# Altium PCB Board.PcbDoc (part 1 of 2)
Units mil, origin at the board's own origin, x right, y up, seen from the top; angles counter-clockwise.
Board outline 6771.85 x 2362.21 mil, 2 copper layers (Top Layer, Bottom Layer), stack 61.8 mil thick; 72 components, 58 nets, 281 pads, 84 vias.
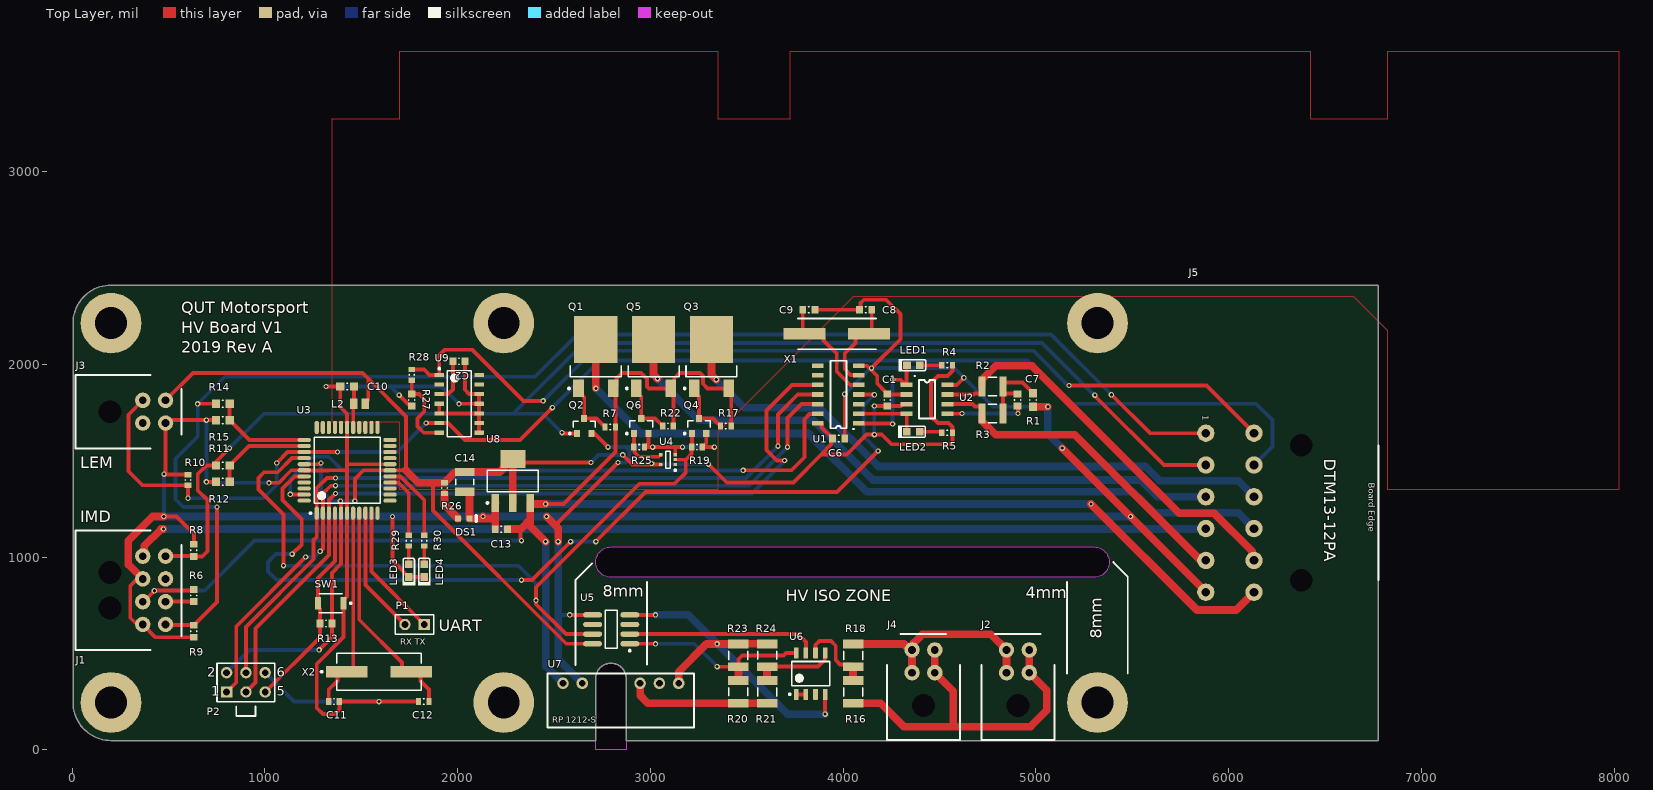
[diagram p0: Top Layer view]
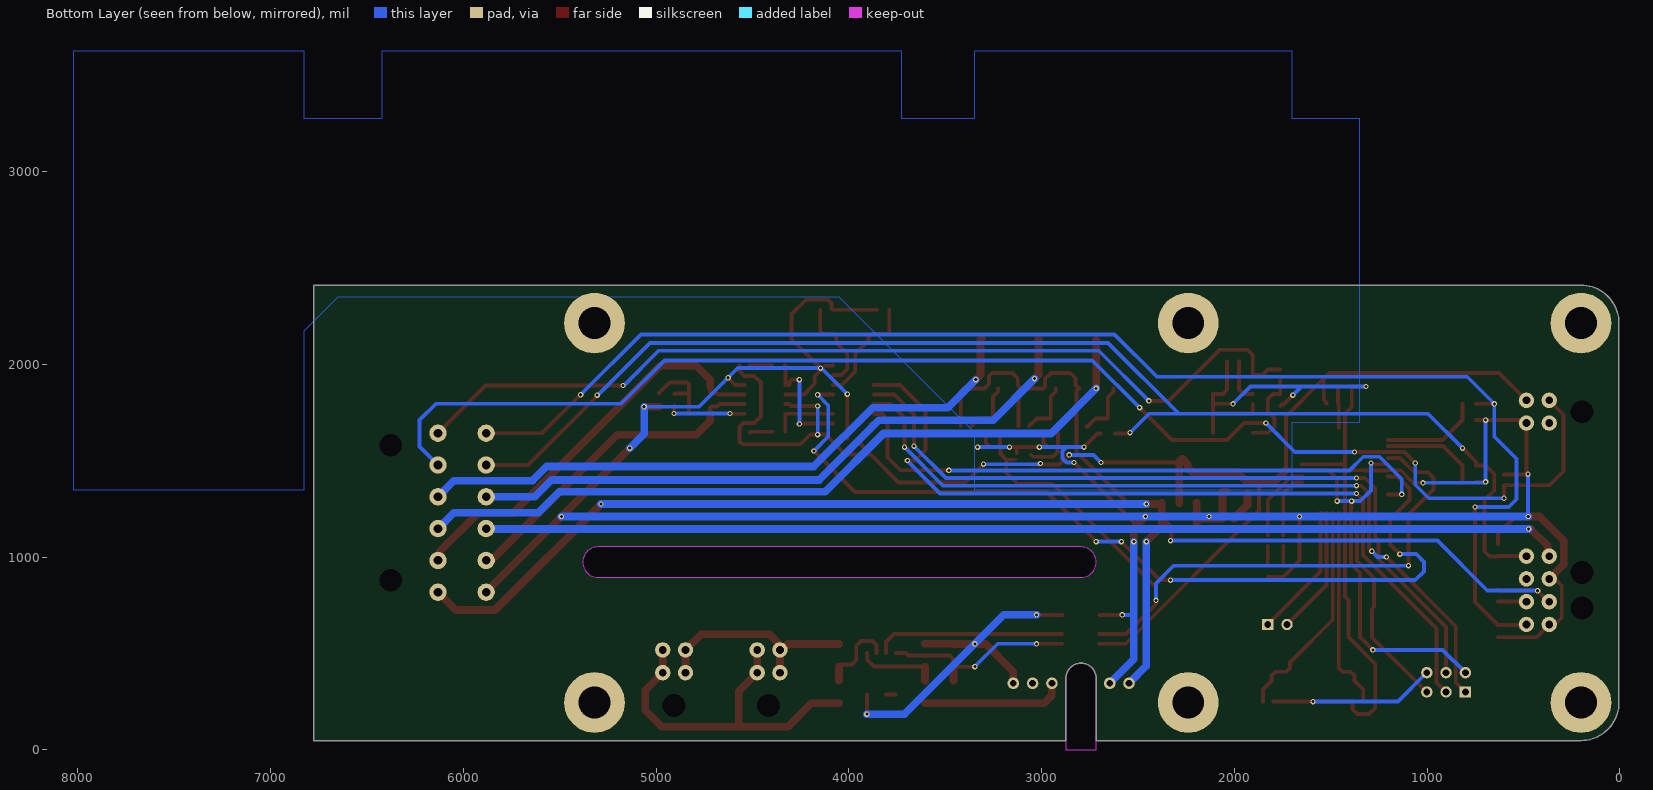
[diagram p1: Bottom Layer view, seen from below]

## Layer stack, top to bottom
Top Solder: solder mask 0.4, Solder Resist, Dk 3.5
Top Layer: signal copper 1.4
Dielectric 1: core 59, Core-043, Dk 4.3
Bottom Layer: signal copper 1.4
Bottom Solder: solder mask 0.4, Solder Resist, Dk 3.5

## Board outline
201.85,48.15 cw(c201.85,245) 5,245 5,2213.5 cw(c201.85,2213.5) 201.85,2410.35 6776.85,2410.35 6776.85,48.15 2874.33,48.15 2874.33,370 ccw(c2795.59,370) 2716.85,370 2716.85,48.15
cut-out: 2795.59,895 cw(c2795.59,973.74) 2795.59,1052.48 5301.85,1052.48 cw(c5301.85,973.74) 5301.85,895
cut-out: 2716.85,0 2716.85,370 cw(c2795.59,370) 2874.33,370 2874.33,0

## Design rules (kind name [scope] priority, off if disabled: settings)
Clearance [All] p1: gap=8 ignorepadtopadclearanceinfootprint=FALSE except(0: Arc-Hole Track-Hole SMDPad-Hole THPad-Hole Via-Hole Fill-Hole Poly-Hole Region-Hole Text-Hole; 6: SMDPad-SMDPad)
PolygonConnect [All] p1: connectstyle=Relief reliefconductorwidth=10 reliefentries=4 polygonreliefangle="90 Angle" airgapwidth=10
RoutingVias [All] p1: holewidth=15.75 width=27.56 viastyle="Through Hole" minholewidth=15.75 minwidth=27.56 maxholewidth=15.75 maxwidth=27.56
SolderMaskExpansion [All] p1: expansion=4
Width [All] p1: maxlimit=40 minlimit=10 preferedwidth=20 minimp=50.000000 maximp=50.000000 favimp=50.000000
30 further rules are at their usual default settings.

## Classes and differential pairs
component class Power: C13 C14 DS1 R26 U8
component class TSAL: Q3 Q4 Q5 Q6 R16 R17 R18 R19 R20 R21 R22 R23 R24 R25 U4 U5 U6 U7
component class Offboard: J4 J5
component class MCU: C10 C11 C12 L2 LED3 LED4 P1 P2 R11 R12 R13 R14 R15 R29 R30 SW1 U3 X2
component class LEM: C2 J3 R10 R27 R28 U9
component class IMD: J1 J2 Q1 Q2 R6 R7 R8 R9
component class CAN: C1 C6 C7 C8 C9 LED1 LED2 R1 R2 R3 R4 R5 U1 U2 X1

## Components (designator, comment, footprint, x,y, rotation, side; value= is the part's Value field where it differs from the comment)
C1 "CAP 100nF 16V 0603(1608)" CAPC0603(1608)100_N 4229.92,1815 r270 top value=100nF
C2 "CAP 100nF 16V 0603(1608)" CAPC0603(1608)100_N 2006.85,2015 r180 top value=100nF
C6 "CAP 100nF 16V 0603(1608)" CAPC0603(1608)100_N 3976.85,1615 r180 top value=100nF
C7 "CAP 4.7nF 50V 0603(1608)" CAPC0603(1608)100_M 4984.92,1815 r90 top value=4.7nF
C8 "CAP 22pF 16V 0603(1608)" CAPC0603(1608)100_N 4116.85,2283.11 r0 top value=22pF
C9 "CAP 22pF 16V 0603(1608)" CAPC0603(1608)100_N 3821.85,2283.11 r0 top value=22pF
C10 "CAP 100nF 16V 0603(1608)" CAPC0603(1608)100_M 1426.85,1885 r0 top value=100nF
C11 "CAP 22pF 16V 0603(1608)" CAPC0603(1608)100_L 1359.29,250 r180 top value=22pF
C12 "CAP 22pF 16V 0603(1608)" CAPC0603(1608)100_L 1824.29,250 r0 top value=22pF
C13 "CAP 100nF 25V 0603(1608)" CAPC0603(1608)100_N 2226.85,1145 r0 top value=100nF
C14 "12103D106KAT2A" CAPC3225X279X50LL20T25 2036.85,1390 r90 top
DS1 "LTST-C191KGKT" LITE-ON-LTST-C191KRKT-2_V 2031.85,1200 r0 top
J1 "Microfit 3.0 2x4" Microfit_2X4_R_TH 196.85,827.52 r270 top
J2 "Microfit 3.0 2x2" MICROFIT_2X2_R_TH 4906.85,230 r0 top
J3 "Microfit 3.0 2x2" MICROFIT_2X2_R_TH 196.85,1754.06 r270 top
J4 "Microfit 3.0 2x2" MICROFIT_2X2_R_TH 4416.85,230 r0 top
J5 "DTM12" DTM13-12PA 6376.85,1230 r270 top
L2 "LQM21FN100M70L" MURA-IND0805_L 1491.85,1795 r0 top
LED1 "2V 20mA 0603 Org" KING-LED0603-25-ORANGE_V 4364.92,1995 r0 top
LED2 "2V 20mA 0603 Org" KING-LED0603-25-ORANGE_V 4363.39,1650 r0 top
LED3 "2V 20mA 0603 Org" KING-LED0603-25-ORANGE_V 1746.85,929.99 r90 top
LED4 "2V 20mA 0603 Org" KING-LED0603-25-ORANGE_V 1826.85,929.99 r90 top
P1 "UART Header" HDR1X2 1826.85,650 r180 top
P2 "Header 3X2" HDR2X3 801.85,300 r0 top
Q1 "SUD50P06-15-GE3" VSIL-TO-252AA-3_V 2716.85,2040 r90 top
Q2 "2N7002KT1G" ONSC-SOT-23-3-318-08_V 2656.85,1680 r90 top
Q3 "SUD50P06-15-GE3" VSIL-TO-252AA-3_V 3316.85,2040 r90 top
Q4 "BSS138-7-F" DIOD-SOT23-3_V 3252.74,1680 r90 top
Q5 "SUD50P06-15-GE3" VSIL-TO-252AA-3_V 3016.85,2040 r90 top
Q6 "BSS138-7-F" DIOD-SOT23-3_V 2952.74,1680 r90 top
R1 "300R 5% 0603(1608)" RESC0603(1608)_N 4904.92,1815 r90 top value="300.00 Ohm"
R2 "60R4 1% 1210(3225)" RESC1210(3225)_L 4774.92,1885 r180 top value="60.40 Ohm"
R3 "60R4 1% 1210(3225)" RESC1210(3225)_L 4774.92,1745 r180 top value="60.40 Ohm"
R4 "330R 5% 0603(1608)" RESC0603(1608)_L 4539.92,1995 r0 top value="330.00 Ohm"
R5 "330R 5% 0603(1608)" RESC0603(1608)_L 4539.92,1645 r0 top value="330.00 Ohm"
R6 "2K2 5% 0603(1608)" RESC0603(1608)_N 631.85,800 r90 top value="2200.00 Ohm"
R7 "1K 5% 0603(1608)" RESC0603(1608)_L 2791.85,1675 r0 top value="1000.00 Ohm"
R8 "2K2 5% 0603(1608)" RESC0603(1608)_N 631.85,1035 r270 top value="2200.00 Ohm"
R9 "2K2 5% 0603(1608)" RESC0603(1608)_N 631.85,615 r90 top value="2200.00 Ohm"
R10 "1K 5% 0603(1608)" RESC0603(1608)_L 601.85,1400 r270 top value="1000.00 Ohm"
R11 "22K 5% 0603(1608)" RESC0603(1608)_M 781.85,1475 r180 top value="22000.00 Ohm"
R12 "15K 5% 0603(1608)" RESC0603(1608)_M 781.85,1390 r0 top value="15000.00 Ohm"
R13 "10K 5% 0603(1608)" RESC0603(1608)_N 1316.85,655.23 r0 top value="10000.00 Ohm"
R14 "22K 5% 0603(1608)" RESC0603(1608)_M 781.85,1795 r180 top value="22000.00 Ohm"
R15 "15K 5% 0603(1608)" RESC0603(1608)_M 781.85,1710 r0 top value="15000.00 Ohm"
R16 "9K1 5% 1210(3225)" RESC1210(3225)_N 4051.85,300 r270 top value="9100.00 Ohm"
R17 "1K 5% 0603(1608)" RESC0603(1608)_L 3391.85,1680 r0 top value="1000.00 Ohm"
R18 "1K 5% 1210(3225)" RESC1210(3225)_N 4051.85,490 r270 top value="1000.00 Ohm"
R19 "1K 5% 0603(1608)" RESC0603(1608)_L 3241.85,1570 r180 top value="1000.00 Ohm"
R20 "4K7 5% 1210(3225)" RESC1210(3225)_N 3456.85,300.94 r270 top value="4700.00 Ohm"
R21 "1K 5% 1210(3225)" RESC1210(3225)_N 3605.32,300.31 r270 top value="1000.00 Ohm"
R22 "1K 5% 0603(1608)" RESC0603(1608)_L 3091.85,1680 r0 top value="1000.00 Ohm"
R23 "3K3 5% 1210(3225)" RESC1210(3225)_N 3456.85,490 r270 top value="3300.00 Ohm"
R24 "1K 5% 1210(3225)" RESC1210(3225)_N 3605.32,490.31 r270 top value="1000.00 Ohm"
R25 "1K 5% 0603(1608)" RESC0603(1608)_L 2941.85,1570 r180 top value="1000.00 Ohm"
R26 "100R 5% 0603(1608)" RESC0603(1608)_L 1931.85,1357.56 r90 top value="100.00 Ohm"
R27 "4K7 5% 0603(1608)" RESC0603(1608)_N 1761.85,1815 r270 top value="4700.00 Ohm"
R28 "6K2 5% 0603(1608)" RESC0603(1608)_L 1761.85,1945 r90 top value="6200.00 Ohm"
R29 "330R 5% 0603(1608)" RESC0603(1608)_L 1746.85,1085 r270 top value="330.00 Ohm"
R30 "330R 5% 0603(1608)" RESC0603(1608)_L 1826.85,1085 r270 top value="330.00 Ohm"
SW1 "B3U-1000P" OMRON-B3U-1000_V 1341.85,760 r180 top
U1 "MCP2517FD" "MCP2517FD SOIC" 4081.85,1693.11 r180 top
U2 "MCP2561" "MCP2561 SOIC" 4329.25,1893.11 r0 top
U3 "ATmega1284P-AU" 44A_N 1426.85,1450 r90 top
U4 "NC7SZ04P5X" FAIR-SC70-5_V 3091.85,1505 r180 top
U5 "Si8620BC-B-IS" SLAB-SOIC-8-NB_M 2796.85,625 r180 top
U6 "LM358AM" D0008A_N 3831.85,395 r90 top
U7 "Isolated DC DC Converter" RP1212S 2846.85,345 r0 top
U8 "LD1117S50CTR" SOT-223_N 2286.85,1395 r90 top
U9 "LM339D" D0014A_L 2008.5,1795 r0 top
X1 "Crystal 20MHz" "Crystal 20MHz" 3966.85,2158.11 r180 top
X2 "ATS16ASM-1" CTS-ATS-SM-XTAL-2 1591.85,405 r0 top

## Footprints (in the part's own frame and the unit in brackets; to place one, negate y for a bottom-side part, rotate by r counter-clockwise, add the part's x,y. Pads: shape width x height; smd on the part's side, far side on the other; paste and mask are expansions set on the pad)
44A_N [mm] "Thin QFP, 44-Leads, Body 10x10mm, Pitch 0.8mm, IPC Medium Density"
  oval 1.75x0.55 smd: 1(-5.65,4) 2(-5.65,3.2) 3(-5.65,2.4) 4(-5.65,1.6) 5(-5.65,0.8) 6(-5.65,0) 7(-5.65,-0.8) 8(-5.65,-1.6) 9(-5.65,-2.4) 10(-5.65,-3.2) 11(-5.65,-4) 23(5.65,-4) 24(5.65,-3.2) 25(5.65,-2.4) 26(5.65,-1.6) 27(5.65,-0.8) 28(5.65,0) 29(5.65,0.8) 30(5.65,1.6) 31(5.65,2.4) 32(5.65,3.2) 33(5.65,4)
  oval 0.55x1.75 smd: 12(-4,-5.65) 13(-3.2,-5.65) 14(-2.4,-5.65) 15(-1.6,-5.65) 16(-0.8,-5.65) 17(0,-5.65) 18(0.8,-5.65) 19(1.6,-5.65) 20(2.4,-5.65) 21(3.2,-5.65) 22(4,-5.65) 34(4,5.65) 35(3.2,5.65) 36(2.4,5.65) 37(1.6,5.65) 38(0.8,5.65) 39(0,5.65) 40(-0.8,5.65) 41(-1.6,5.65) 42(-2.4,5.65) 43(-3.2,5.65) 44(-4,5.65)
  silkscreen extent -5.77,-4.35 4.35,4.95, body extent -5,-5 5,5, height 1.2
CAPC0603(1608)100_L [mm] "Chip Capacitor, Body 1.6x0.8mm, Height 1.0mm, IPC High Density"
  rect 0.7x0.9 smd: 1(-0.7,0) 2(0.7,0)
  silkscreen extent -0.05,-0.35 0.05,0.35, body extent -0.87,-0.47 0.88,0.48, height 1
CAPC0603(1608)100_M [mm] "Chip Capacitor, Body 1.6x0.8mm, Height 1.0mm, IPC Low Density"
  rect 1.1x1.1 smd: 1(-0.9,0) 2(0.9,0)
  silkscreen extent -0.05,-0.45 0.05,0.45, body extent -0.87,-0.47 0.88,0.48, height 1
CAPC0603(1608)100_N [mm] "Chip Capacitor, Body 1.6x0.8mm, Height 1.0mm, IPC Medium Density"
  rect 0.9x1 smd: 1(-0.8,0) 2(0.8,0)
  silkscreen extent -0.05,-0.4 0.05,0.4, body extent -0.87,-0.48 0.88,0.47, height 1
CAPC3225X279X50LL20T25 [mm] "Chip Capacitor, 2-Leads, Body 3.40x2.70mm, IPC High Density"
  rect 1.1x2.6 smd: 1(-1.3,0) 2(1.3,0)
  silkscreen extent -0.35,-1.2 0.35,1.2, body extent -1.7,-1.35 1.7,1.35, height 2.79
"Crystal 20MHz" [mm]
  rect 5.5x1.5 smd: 1(-4.25,0) 2(4.25,0)
  silkscreen extent -5.21,-2.03 5.08,2.03, body extent -5.29,-1.91 5.21,1.9, height 4.3
CTS-ATS-SM-XTAL-2 [mm] "SMD, 2-Leads, Body 11.1x4.83mm, Pitch 8.5mm"
  rect 5.5x1.5 smd: 1(-4.25,0) 2(4.25,0)
  silkscreen extent -7.67,-2.41 5.55,2.41, body extent -5.59,-2.42 5.59,2.42, height 4.3
D0008A_N [mm] "SOIC, 8-Leads, Body 5x4mm, Pitch 1.27mm, IPC Medium Density"
  rrect17% 1.45x0.6 smd: 1(-2.725,1.905) 2(-2.725,0.635) 3(-2.725,-0.635) 4(-2.725,-1.905) 5(2.725,-1.905) 6(2.725,-0.635) 7(2.725,0.635) 8(2.725,1.905)
  silkscreen extent -2.85,-2.5 1.6,2.88, body extent -3,-2.45 3,2.45, height 1.63
D0014A_L [mm] "SOIC, 14-Leads, Body 8.75x4mm, Pitch 1.27mm, IPC High Density"
  rrect18% 1.25x0.55 smd: 1(-2.625,3.81) 2(-2.625,2.54) 3(-2.625,1.27) 4(-2.625,0) 5(-2.625,-1.27) 6(-2.625,-2.54) 7(-2.625,-3.81) 8(2.625,-3.81) 9(2.625,-2.54) 10(2.625,-1.27) 11(2.625,0) 12(2.625,1.27) 13(2.625,2.54) 14(2.625,3.81)
  silkscreen extent -2.75,-4.38 1.6,4.76, body extent -3.02,-4.32 3.02,4.32, height 1.59
DIOD-SOT23-3_V [mm] "SOT23, 3-Leads, Body 3x1.4mm, Pitch 0.95mm"
  rect 0.9x0.8 smd: 1(-1,0.95) 2(-1,-0.95) 3(1,0)
  silkscreen extent -1.12,-1.5 0.7,2.02, body extent -1.25,-1.5 1.25,1.5, height 1.1
DTM13-12PA [mil]
  round 90 hole 45: 1(412.5,-495) 2(247.5,-495) 3(82.5,-495) 4(-82.5,-495) 5(-247.5,-495) 6(-412.5,-495) 7(-412.5,-245) 8(-247.5,-245) 9(-82.5,-245) 10(82.5,-245) 11(247.5,-245) 12(412.5,-245)
  round 0 hole 118.11 mask+39.37: NC(-350,0) NC(350,0)
  silkscreen extent -350,400 350,400, body extent -1200,-590 1200,914, height 1350
FAIR-SC70-5_V [mm] "SOT23, 5-Leads, Body 2.2x1.35mm, Pitch 0.65mm"
  rect 0.5x0.4 smd: 1(-0.95,0.65) 2(-0.95,0) 3(-0.95,-0.65) 4(0.95,-0.65) 5(0.95,0.65)
  silkscreen extent -1.08,-1.1 0.3,1.52, body extent -1.2,-1.1 1.2,1.1, height 1.1
HDR1X2 [mm] "Connector; Header; 2 Position"
  rect 1.5x1.5 hole 0.9: 1(0,0)
  round 1.5 hole 0.9: 2(2.54,0)
  silkscreen extent -1.27,-1.27 3.81,1.27
HDR2X3 [mm] "Connector; Header; 3x2 Position"
  rect 1.5x1.5 hole 0.9: 1(0,0)
  round 1.5 hole 0.9: 2(0,2.54) 3(2.54,0) 4(2.54,2.54) 5(5.08,0) 6(5.08,2.54)
  silkscreen extent -1.27,-1.27 6.35,3.81
KING-LED0603-25-ORANGE_V [mm] "LED, SMT, Body 1.6 x 0.8 mm, 0.25mm Thickness"
  rect 1x1 smd paste+0 mask+0: 1(0.85,0) 2(-0.85,0)
  silkscreen extent -1.97,-0.85 1.6,0.85, body extent -0.8,-0.4 0.8,0.4, height 0.25
LITE-ON-LTST-C191KRKT-2_V [mm] "Chip, 2-Leads, Body 1.6x0.8mm"
  rect 0.8x0.8 smd: 1(-0.75,0) 2(0.75,0)
  silkscreen extent 1.65,-0.4 1.65,0.4, body extent -0.8,-0.4 0.8,0.4, height 0.55
"MCP2517FD SOIC" [mm]
  rect 1.5x0.6 smd: 1(0,0) 2(0,-1.27) 3(0,-2.54) 4(0,-3.81) 5(0,-5.08) 6(0,-6.35) 7(0,-7.62) 8(5.4,-7.62) 9(5.4,-6.35) 10(5.4,-5.08) 11(5.4,-3.81) 12(5.4,-2.54) 13(5.4,-1.27) 14(5.4,0)
  silkscreen extent 0.63,-8.25 3.76,0.76, body extent 0.74,-8.13 4.64,0.52, height 1.74
"MCP2561 SOIC" [mm]
  rect 1.55x0.6 smd: 1(0,0) 2(0,-1.27) 3(0,-2.54) 4(0,-3.81) 5(5.4,-3.81) 6(5.4,-2.54) 7(5.4,-1.27) 8(5.4,0)
  silkscreen extent 1.02,-4.44 3.74,1.14, body extent 0.51,-4.38 4.64,0.52, height 1.65
MICROFIT_2X2_R_TH [mil]
  round 80 hole 40: 1(59.06,170) 2(-59.06,170) 3(59.06,288.19) 4(-59.06,288.19)
  round 0 hole 118.11 mask+10: NC(0,0)
  silkscreen extent -190,-180 190,370, body extent -190,-180 190,210, height 290
Microfit_2X4_R_TH [mil]
  round 80 hole 40: 1(177.17,170) 2(59.06,170) 3(-59.06,170) 4(-177.17,170) 5(177.17,288.19) 6(59.06,288.19) 7(-59.06,288.19) 8(-177.17,288.19)
  round 0 hole 118.11 mask+10: NC(-92.52,0) NC(92.52,0)
  silkscreen extent -310,-180 310,370, body extent -310,-180 310,210, height 290
MURA-IND0805_L [mm] "Chip Inductor, 2-Leads, Body 2.2x1.45mm, IPC High Density"
  rect 0.99x1.39 smd: 1(-0.755,0) 2(0.755,0)
  body extent -1.1,-0.72 1.1,0.72, height 1.45
OMRON-B3U-1000_V [mm] "SMD, 2-Leads, Body 3x2.5mm"
  rect 0.8x1.7 smd: 1(-1.7,0) 2(1.7,0)
  silkscreen extent -2.78,-1.25 1.5,1.25, body extent -1.5,-1.25 1.5,1.25, height 1.75
ONSC-SOT-23-3-318-08_V [mm] "SOT23, 3-Leads, Body 2.92x1.3mm, Pitch 0.95mm"
  rect 0.9x0.8 smd: 1(-1,0.95) 2(-1,-0.95) 3(1,0)
  silkscreen extent -1.12,-1.46 0.65,2.02, body extent -0.65,-1.46 0.65,1.46, height 1.11
RESC0603(1608)_L [mm] "Chip Resistor, Body 1.6x0.8mm, IPC High Density"
  rect 0.7x0.9 smd: 1(-0.7,0) 2(0.7,0)
  silkscreen extent -0.05,-0.35 0.05,0.35, body extent -0.85,-0.47 0.85,0.47, height 0.6
RESC0603(1608)_M [mm] "Chip Resistor, Body 1.6x0.8mm, IPC Low Density"
  rect 1.1x1.1 smd: 1(-0.9,0) 2(0.9,0)
  silkscreen extent -0.05,-0.45 0.05,0.45, body extent -0.85,-0.47 0.85,0.47, height 0.6
RESC0603(1608)_N [mm] "Chip Resistor, Body 1.6x0.8mm, IPC Medium Density"
  rect 0.9x1 smd: 1(-0.8,0) 2(0.8,0)
  silkscreen extent -0.05,-0.4 0.05,0.4, body extent -0.85,-0.47 0.85,0.47, height 0.6
RESC1210(3225)_L [mm] "Chip Resistor, Body 3.2x2.5mm, IPC High Density"
  rect 0.95x2.6 smd: 1(-1.4,0) 2(1.4,0)
  silkscreen extent -0.55,-1.2 0.55,1.2, body extent -1.7,-1.35 1.7,1.35, height 0.71
RESC1210(3225)_N [mm] "Chip Resistor, Body 3.2x2.5mm, IPC Medium Density"
  rect 1.15x2.7 smd: 1(-1.5,0) 2(1.5,0)
  silkscreen extent -0.55,-1.25 0.55,1.25, body extent -1.7,-1.35 1.7,1.35, height 0.71
RP1212S [mil]
  round 60 hole 35: 1(-300,0) 2(-200,0) 5(100,0) 6(200,0) 7(300,0)
  silkscreen extent -380,-230 380,50, body extent -380,-230 380,50, height 400
SLAB-SOIC-8-NB_M [mm] "SOIC, 8-Leads, Body 5x4mm, Pitch 1.27mm, IPC Low Density"
  oval 2.5x0.7 smd: 1(-2.45,1.905) 2(-2.45,0.635) 3(-2.45,-0.635) 4(-2.45,-1.905) 5(2.45,-1.905) 6(2.45,-0.635) 7(2.45,0.635) 8(2.45,1.905)
  silkscreen extent -2.58,-2.5 0.8,2.93, body extent -2,-2.5 2,2.5, height 1.75
SOT-223_N [mm] "SOT223, 4-Leads, Body 6.5x3.5mm, Pitch 2.3mm, Lead Span 7mm, IPC Medium Density"
  rect 2.4x1 smd: 1(-2.9,2.3) 2(-2.9,0) 3(-2.9,-2.3)
  rect 2.4x3.3 smd: 4(2.9,0)
  silkscreen extent -3.02,-3.35 1.4,3.47, body extent -1.85,-3.35 1.85,3.35, height 1.8
VSIL-TO-252AA-3_V [mm] "DPAK, 3-Leads, Body 6.73x6.22mm, Pitch 2.28mm"
  rect 2.286x1.397 smd: 1(-4.185,2.28) 3(-4.185,-2.28)
  rect 6.18x5.69 smd: 2(2.25,0)
  silkscreen extent -4.32,-3.35 -1.24,3.65, body extent -2.8,-3.37 3.42,3.37, height 2.38

## Part data
C1 C2 C6: library part CMP-1035-02584-1, "CAP 100nF 16V ±10% 0603 (1608 Metric) Thickness 1mm SMD", Case-EIA=0603, Case-Metric=1608, Rated Voltage="16 V", Tolerance=±10%, Max Thickness="1 mm", Technology=SMT
C7: library part CMP-1035-02202-1, "CAP 4.7nF 50V ±5% 0603 (1608 Metric) Thickness 1mm SMD", Case-EIA=0603, Case-Metric=1608, Rated Voltage="50 V", Tolerance=±5%, Max Thickness="1 mm", Technology=SMT
C8 C9: library part CMP-1035-00808-1, "CAP 22pF 16V ±5% 0603 (1608 Metric) Thickness 1mm SMD", Case-EIA=0603, Case-Metric=1608, Rated Voltage="16 V", Tolerance=±5%, Max Thickness="1 mm", Technology=SMT
C10: library part CMP-1035-02583-1, "CAP 100nF 16V ±5% 0603 (1608 Metric) Thickness 1mm SMD", Case-EIA=0603, Case-Metric=1608, Rated Voltage="16 V", Tolerance=±5%, Max Thickness="1 mm", Technology=SMT
C11 C12: library part CMP-1035-00806-1, "CAP 22pF 16V ±1% 0603 (1608 Metric) Thickness 1mm SMD", Case-EIA=0603, Case-Metric=1608, Rated Voltage="16 V", Tolerance=±1%, Max Thickness="1 mm", Technology=SMT
C13: library part CMP-1035-02587-1, "CAP 100nF 25V ±5% 0603 (1608 Metric) Thickness 1mm SMD", Case-EIA=0603, Case-Metric=1608, Rated Voltage="25 V", Tolerance=±5%, Max Thickness="1 mm", Technology=SMT
C14: library part CMP-2000-05477-1, "Chip Capacitor, 10 uF, +/- 10%, 25 V, -55 to 85 degC, 1210 (3225 Metric), RoHS, Tape and Reel", Capacitance=10µF, Manufacturer=AVX, Operating Temperature=-55°C~85°C, Package / Case=1210(3225Metric), Package Description="2-Pin Surface Mount Device, Body 3.2 x 2.5 mm", Package Reference=1210, Ratings=-, Standard Package=1, Temperature Coefficient=X5R, Tolerance=±10%, Voltage - Rated=25V, Applications=GeneralPurpose, Catalog Drawings=AT2A_1210_2.79, Category=Capacitors, Datasheet URL=http://datasheets.avx.com/cx5r.pdf, Datasheet Version=05/2016, Family=CeramicCapacitors, Features=-, Height - Seated (Max)=-, Lead Spacing=-, Lead Style=-, Manufacturer URL=http://www.avx.com/, Mounting Technology=SurfaceMount, Mounting Type=SurfaceMount,MLCC, Online Catalog=X5RDielectric(D), Other Names=478-1627-6, Packaging=Digi-Reel®, Product Training Modules=ComponentSolutionsforSmartMeterApplications, Series=-, Size / Dimension="0.126\"Lx0.098\"W(3.20mmx2.50mm)", Thickness (Max)="0.110\"(2.79mm)"
DS1: library part CMP-2000-05198-1, "Chip LED, Green, 574 nm, 40 pF, -55 to 85 degC, 2-Pin SMD, RoHS, Tape and Reel", Emitting Color=YellowGreen, Forward Current=30mA, Forward Voltage=2.4V, Manufacturer=Lite-On, Operating Temperature Classification=Industrial, Operating Temp Range=-55Cto85C, Package Type=ChipLed, Power Dissipation=75W, Reverse Voltage=5V, Test Current (It)=20mA, Chip Material=AlGaInP, Datasheet URL=http://download.siliconexpert.com/pdfs/2007/08/26/semi_b/manual/lot/ds/ltst-c191kgkt.pdf, Datasheet Version=Jan-07, DELETED=Compliant, Dominant Wave Length=571nm, High Brightness=Yes, Lens Dimensions=1.1X0.8X0.37mm, Luminous Intensity=35mcd, Lum Intensity=35mcd, Main Category=ChipLED, Manufacturer URL=http://www.us.liteon.com/, Mounting=SurfaceMount, Number of Elements=1, Packaging=TapeandReel, Peak Wavelength=574nm, Pin Count=2, Product Depth (mm)=0.8mm, Product Height (mm)=0.55mm, Product Length (mm)=1.6mm, Rad Hardened=No, Shape Type=Rectangular, Type=Uni-Color, Viewing Angle=130deg
J1: library part Microfit_2x4
J2 J3 J4: library part Microfit_2x2
L2: library part CMP-2000-06587-1, "Fixed Inductor, 10 uH, +/-20%, -55 to 125 degC, 2-Pin SMD (0805), RoHS, Tape and Reel", Case Size/Dimension=0805, DC Resistance=0.6, Inductance-Nom=10H, Manufacturer=Murata, Package Description="2-Pin Surface Mount Device, Body 2 x 1.25 mm", Package Reference=IND0805, Rated Current-Max=100mA, Tolerance (%)=20%, Datasheet URL=http://psearch.en.murata.com/inductor/product/LQM21FN100M70%23.pdf, Datasheet Version=05/2016, Manufacturer URL=http://www.murata.com/, Mounting Technology=SurfaceMount
LED1 LED2 LED3 LED4: library part CMP-0239-00002-1, "LED, SMT, 0603(1608), 0.25mm Tthickness, Super Bright Orange", Forward Current="30 mA", PartNumber=APG1608SEKC/T, Power Dissipation="75 mW", Reverse Voltage="5 V", Storage Temperature="-40 to 85 degC", ComponentLink1Description="Manufacturer URL", ComponentLink1URL=http://www.kingbrightusa.com/, ComponentLink2Description=Datasheet, ComponentLink2URL=http://www.kingbrightusa.com/images/catalog/SPEC/APG1608SEKC-T.pdf, DatasheetVersion="Rev. 4A, 12/2011", Mounting Technology="Surface Mount", PackageDescription="2-Pin SMT LED, 1.6 x 0.8 mm Body, 0.25mm Thickness", PackageReference=LED0603-25-ORANGE, PackageVersion="Rev. 4A, 12/2011", Packing=Reel
P1: library part "Header 2", LatestRevisionDate=17-Jul-2002, LatestRevisionNote="Re-released for DXP Platform.", Publisher="Altium Limited"
P2: "Header, 3-Pin, Dual row", LatestRevisionDate=17-Jul-2002, LatestRevisionNote="Re-released for DXP Platform.", Publisher="Altium Limited"
Q1 Q3 Q5: library part CMP-2000-05431-1, "P-Channel (D-S) MOSFET, 30 V, -55 to 150 degC, 3-Pin TO-252, RoHS, Tape and Reel", Id - Continuous Drain Current=50A, Manufacturer=Vishay, Maximum Operating Temperature=+150C, Minimum Operating Temperature=-55C, Package / Case=TO-252AA-3, Package Description="3-Pin Surface Mount Device, Body 6.54 x 6.095 mm, Pitch 2.28 mm", Package Reference=TO-252, Pd - Power Dissipation=2.5W, Rds On - Drain-Source Resistance=15mOhms, Vds - Drain-Source Breakdown Voltage=-60V, Vgs - Gate-Source Voltage=20V, Brand=VishaySemiconductors, Channel Mode=Enhancement, Configuration=Single, Datasheet URL=https://datasheet.ciiva.com/4444/sud50p06-244530-4444327.pdf, Datasheet Version="Rev. C, 07/2013", Factory Pack Quantity=2000, Fall Time=175ns, Height=2.39mm, Length=6.73mm, Manufacturer URL=http://www.vishay.com/, Mounting Style=SMD/SMT, Number of Channels=1Channel, Package URL=http://www.vishay.com/docs/89975/v15wl45c-m3.pdf, Packaging=Reel, Product Category=MOSFET, Rise Time=70ns, RoHS=True, Series=SUD, Technology=Si, Tradename=TrenchFET, Transistor Polarity=P-Channel, Transistor Type=1P-Channel, Typical Turn-Off Delay Time=175ns, Typical Turn-On Delay Time=15ns, Unit Weight=0.050717oz, Width=6.22mm
Q2: library part CMP-1058-00766-1, "Small Signal MOSFET, 60 V, 380 mA, Single, N-Channel, 3-Pin SOT-23, Pb-Free, Tape and Reel", Manufacturer="On Semiconductor", Package Type=SOT-23-3, Channel Polarity="N Channel", Ciss Typ (pF)=24.5, ComponentLink1Description="Manufacturer URL", ComponentLink1URL=http://www.onsemi.com/, ComponentLink2Description=Datasheet, ComponentLink2URL=http://www.onsemi.com/pub_link/Collateral/2N7002K-D.PDF, ComponentLink3Description="Package Specification", ComponentLink3URL=http://www.onsemi.cn/pub_link/Collateral/318-08.PDF, Configuration=Single, Coss Typ (pF)=4.2, Crss Typ (pF)=2.2, DatasheetVersion="Rev. 11", ID Max (A)=0.38, Mounting Technology="Surface Mount", PackageDescription="3-Pin Small Outline Transistor, Body 2.92 x 1.3 mm, Pitch 0.95 mm", PackageReference=SOT-23-3-318-08, PackageVersion="Rev. AP, 11/2009", Packing="Tape and Reel", PartNumber=2N7002KT1G, RoHS=Pb-Free, V(BR)DSS Min (V)=60, VGS(th) Max (V)=2.3, VGS Max (V)=20
Q4 Q6: library part CMP-2000-04930-1, "N-Channel Enhancement Mode Mosfet, 50 V, 0.2 A, -55 to 150 degC, 3-Pin SOT23, RoHS, Tape and Reel", Id - Continuous Drain Current=200mA, Manufacturer="Diodes Inc", Maximum Operating Temperature=+150C, Minimum Operating Temperature=-55C, Package / Case=SOT-23-3, Package Description="3-Pin Small Outline Transistor, Body 2.9 x 1.3 mm, Pitch 0.96 mm", Package Reference=SOT23-3, Pd - Power Dissipation=300mW, Rds On - Drain-Source Resistance=3.5Ohms, Vds - Drain-Source Breakdown Voltage=50V, Vgs - Gate-Source Voltage=20V, Brand=DiodesIncorporated, Channel Mode=Enhancement, Configuration=Single, Datasheet URL=https://datasheet.ciiva.com/8115/ds30144-8115344.pdf, Datasheet Version="Rev. 20-2, 11/2013", Factory Pack Quantity=3000, Height=1mm, Length=2.9mm, Manufacturer URL=http://www.diodes.com/, Mounting Style=SMD/SMT, Number of Channels=1Channel, Packaging=Reel, Product=MOSFETSmallSignal, Product Category=MOSFET, RoHS=True, Series=BSS138, Technology=Si, Transistor Polarity=N-Channel, Transistor Type=1N-Channel, Typical Turn-Off Delay Time=20ns, Typical Turn-On Delay Time=20ns, Unit Weight=0.000282oz, Width=1.3mm
R1: library part CMP-1012-00061-1, "300R 0.1W 5% 0603 (1608 Metric)  SMD", Case-EIA=0603, Case-Metric=1608, Power="0.1 W", Tolerance="5 %", Technology=SMT
R2 R3: library part CMP-1015-00372-1, "60R4 0.5W 1% 1210 (3225 Metric)  SMD", Case-EIA=1210, Case-Metric=3225, Power="0.5 W", Tolerance="1 %", Technology=SMT
R4 R5 R29 R30: library part CMP-1012-00062-1, "330R 0.1W 5% 0603 (1608 Metric)  SMD", Case-EIA=0603, Case-Metric=1608, Power="0.1 W", Tolerance="5 %", Technology=SMT
R6 R8 R9: library part CMP-1012-00082-1, "2K2 0.1W 5% 0603 (1608 Metric)  SMD", Case-EIA=0603, Case-Metric=1608, Power="0.1 W", Tolerance="5 %", Technology=SMT
R7 R10 R17 R19 R22 R25: library part CMP-1012-00074-1, "1K 0.1W 5% 0603 (1608 Metric)  SMD", Case-EIA=0603, Case-Metric=1608, Power="0.1 W", Tolerance="5 %", Technology=SMT
R11 R14: library part CMP-1012-00106-1, "22K 0.1W 5% 0603 (1608 Metric)  SMD", Case-EIA=0603, Case-Metric=1608, Power="0.1 W", Tolerance="5 %", Technology=SMT
R12 R15: library part CMP-1012-00102-1, "15K 0.1W 5% 0603 (1608 Metric)  SMD", Case-EIA=0603, Case-Metric=1608, Power="0.1 W", Tolerance="5 %", Technology=SMT
R13: library part CMP-1012-00098-1, "10K 0.1W 5% 0603 (1608 Metric)  SMD", Case-EIA=0603, Case-Metric=1608, Power="0.1 W", Tolerance="5 %", Technology=SMT
R16: library part CMP-1015-00097-1, "9K1 0.5W 5% 1210 (3225 Metric)  SMD", Case-EIA=1210, Case-Metric=3225, Power="0.5 W", Tolerance="5 %", Technology=SMT
R18 R21 R24: library part CMP-1015-00074-1, "1K 0.5W 5% 1210 (3225 Metric)  SMD", Case-EIA=1210, Case-Metric=3225, Power="0.5 W", Tolerance="5 %", Technology=SMT
R20: library part CMP-1015-00090-1, "4K7 0.5W 5% 1210 (3225 Metric)  SMD", Case-EIA=1210, Case-Metric=3225, Power="0.5 W", Tolerance="5 %", Technology=SMT
R23: library part CMP-1015-00086-1, "3K3 0.5W 5% 1210 (3225 Metric)  SMD", Case-EIA=1210, Case-Metric=3225, Power="0.5 W", Tolerance="5 %", Technology=SMT
R26: library part CMP-1012-00050-1, "100R 0.1W 5% 0603 (1608 Metric)  SMD", Case-EIA=0603, Case-Metric=1608, Power="0.1 W", Tolerance="5 %", Technology=SMT
R27: library part CMP-1012-00090-1, "4K7 0.1W 5% 0603 (1608 Metric)  SMD", Case-EIA=0603, Case-Metric=1608, Power="0.1 W", Tolerance="5 %", Technology=SMT
R28: library part CMP-1012-00093-1, "6K2 0.1W 5% 0603 (1608 Metric)  SMD", Case-EIA=0603, Case-Metric=1608, Power="0.1 W", Tolerance="5 %", Technology=SMT
SW1: library part CMP-2100-03586-1, "Ultra-Small Tactile Switch, 0.05 A, 12 V, -25 to 70 degC, 2-Pin SMD, RoHS, Tape and Reel", Case/Package=SMD/SMT, Contact Current Rating=50mA, Insulation Resistance=100MOhm, Manufacturer="Omron Electronic Components", Max Operating Temperature=70degC, Min Operating Temperature=-25degC, Operating Force=1.5N, Package Description="2-Pin Surface Mount Device, Body 3 x 2.5 mm", Package Quantity=1, Package Reference=B3U-1000, Voltage Rating (DC)=12V, Actuator Length=0.4mm, Contact Material=Silver, Current Rating=50mA, Datasheet URL=http://www.omron.com/ecb/products/pdf/en-b3u.pdf, Datasheet Version=42005.0, Depth=2.5mm, Electrical Life=200000Cycles, Height=1.2mm, Illumination Type=Illuminated, Lead Free=LeadFree, Length=4mm, Manufacturer URL=http://www.omron.com/, Max Current Rating=50mA, Mount=SurfaceMount, Orientation=Straight, Packaging=TapeandReel, REACH SVHC=Unknown, RoHSCompliant=true, Switch Travel=0.15mm, Termination=SMD/SMT, Throw Configuration=SPST, Weight=0.022g, Width=3mm
U3: library part CMP-0095-00577-1, "8-bit AVR Microcontroller, 128KB Flash, 4KB EEPROM, 16KB SRAM, 44-pin TQFP, Industrial Grade (-40°C to 85°C)", Code_JEDEC=MS-026-ACB, ComponentLink1Description="Manufacturer URL", ComponentLink1URL=http://www.atmel.com/, ComponentLink2Description="ATmega164A/164PA/324A/324PA/644A/644PA/1284/1284P Datasheet", ComponentLink2URL=http://www.atmel.com/dyn/resources/prod_documents/doc8272.pdf, ComponentLink3Description="ATmega164A/164PA/324A/324PA/644A/644PA/1284/1284P Summary", ComponentLink3URL=http://www.atmel.com/dyn/resources/prod_documents/8272S.pdf, DatasheetVersion="revC, Jun-2011", PackageDescription="44-Pin Plastic Thin Profile Quad Flat Pack, 10 x 10 x 1.0 mm Body, 0.8 mm Pitch (TQFP)", PackageReference=44A, PackageVersion="revC, Oct-2010"
U4: library part CMP-2000-06814-1, "TinyLogic(R) UHS Inverter, 32 mA, 1.65 to 5.5 V, -40 to 85 degC, 5-Pin SOT23 (SC70), RoHS, Tape and Reel", Manufacturer=FairchildSemiconductor, Maximum High Level Output Current=-32mA, Maximum Low Level Output Current=32mA, Operating Temperature=-40to85°C, Package=5SC-70, Package Description="5-Pin Small Outline Transistor, Body 2 x 1.25 mm, Pitch 0.65 mm", Package Reference=SC70-5, Typical Operating Supply Voltage=1.8, Category=InverterSchmittTrigger, Datasheet URL=https://www.fairchildsemi.com/datasheets/NC/NC7SZ04.pdf, Datasheet Version="Rev. 1.0.5, 02/2011", Fabrication Technology=CMOS, Logic Family=TinyLogicUHS, Logic Function=Inverter, Manufacturer URL=https://www.fairchildsemi.com/, Maximum Propagation Delay Time @ Maximum CL=5@3.3V, Mounting Technology=SurfaceMount, Number of Elements per Chip=1, Package URL=https://www.fairchildsemi.com/package-drawings/MA/MAA05A.pdf, Packaging=Tape&Reel, Propagation Delay Test Condition=50pF, Rad Hard=No
U5: library part CMP-0512-00372-1, "Low-Power Single and Dual-Channel Digital Isolator, 150 Mbps, 3.75 kVRMS Isolation Rating, -40 to 125 degC, 8-pin SOIC", Isolation Rating (kV)=3.75, Manufacturer="Silicon Labs", 10kV surge=FALSE, AEC-Q100=TRUE, Channel Type=Unidirectional, ComponentLink1Description="Manufacturer URL", ComponentLink1URL=http://www.silabs.com/, ComponentLink2Description=Datasheet, ComponentLink2URL=http://www.silabs.com/Support%20Documents/TechnicalDocs/Si861x-2x.pdf, ComponentLink3Description="Package Specification", ComponentLink3URL=http://www.silabs.com/Support%20Documents/TechnicalDocs/Si8220-21.pdf, DatasheetVersion="Rev. 1.3", Enable Control=FALSE, Maximum Data Rate (Mbps)=150, Maximum Propagation Delay (ns)=13, Mounting Technology="Surface Mount", PackageDescription="8-Pin Narrow Body Plastic Small Outline, Body 4.9 x 3.9 mm, Pitch 1.27 mm", PackageReference=SOIC-8-NB, PartNumber=Si8620BC-B-IS, Sub-Family=Isolators
U6: library part CMP-0055-00796-3, "Low Power Dual Operational Amplifier, 8-pin Narrow SOIC", Manufacturer="Texas Instruments", Package Reference=D0008A, PackageTopMarking=NSZXTT*LM*358AM, PowerWise=N, Code_IPC=SOIC127P600-8, Code_JEDEC=MS-012-AA, ComponentLink1Description="Datasheet URL", ComponentLink1URL=http://www.ti.com/general/docs/lit/getliterature.tsp?genericPartNumber=LM358-N&fileType=pdf, CompType=Amplifiers, PackageDescription="SOIC Narrow, 4.9 x 3.9 x 1.45mm, 8 Lead, 1.27mm Pitch", PinCount=8, RoHS=N
U7: library part RP-1212S, ComponentLink1Description=DigiKey, ComponentLink1URL=https://www.digikey.com.au/product-detail/en/recom-power/RP-1212S/945-1254-ND/2256434, ComponentLink2Description=Datasheet, ComponentLink2URL=https://www.recom-power.com/pdf/Econoline/RP.pdf
U8: library part CMP-0244-00311-1, "Fixed Low Drop Positive Voltage Regulator, 5V, 4-Pin SOT-223, Tape and Reel", ComponentLink1Description="Manufacturer URL", ComponentLink1URL=http://www.st.com, ComponentLink2Description=Datasheet, ComponentLink2URL=http://www.st.com/internet/com/TECHNICAL_RESOURCES/TECHNICAL_LITERATURE/DATASHEET/CD00000544.pdf, DatasheetVersion=1/11/2011, PackageDescription="4-Pin SOT-223 Package, 6.5 x 3.5 mm Body, 2.3 mm Pitch, 7 mm Lead Span", PackageReference=SOT-223, PackageVersion=2010
U9: library part CMP-2000-06548-1, "Quad Differential Comparator, 2 to 30 V, 0 to 70 degC, 14-pin SOIC (D14), Green (RoHS & no Sb/Br), Tube", Comparator Case Style=SOIC, Manufacturer="Texas Instruments", Operating Temperature Max=70°C, Operating Temperature Min=0°C, Package Description="14-Pin Small Outline Integrated Circuit, Body 8.65 x 3.9 mm, Pitch 1.27 mm", Package Reference=D14, Package Version="4040047-5/M, 06/2011", Supply Voltage Range=2Vto36V,±1Vto±18V, Automotive Qualification Standard=-, Comparator Type=Differential, Datasheet URL=http://www.ti.com/general/docs/lit/getliterature.tsp?genericPartNumber=LM339&fileType=pdf, Datasheet Version="Rev. T, 06/2015", IC Output Type=CMOS,MOS,TTL, Manufacturer URL=http://www.ti.com/, Mounting Technology=SurfaceMount, No. of Comparators=4, No. of Pins=14Pins, Package URL=http://www.ti.com/lit/ml/mpds177g/mpds177g.pdf, Packaging=CutTape, Product Range=-, Response Time=300ns
X2: library part CMP-0585-00002-2, "ATS-SM Series Quartz Crystal, 16 MHz, -20 to 70 degC, 11.1 x 4.83 x 4.3mm SMD, RoHS, Tape and Reel", Frequency="16 MHz", Manufacturer="CTS Corporation", Operating Temperature="-20 to 70 degC", Shunt Capacitance (C0)="7.0 pF Max", ComponentLink1Description="Manufacturer URL", ComponentLink1URL=http://www.ctscorp.com/, ComponentLink2Description=Datasheet, ComponentLink2URL=http://www.ctscorp.com/components/Datasheets/008-0309-0.pdf, ComponentLink3Description="Package Specification", ComponentLink3URL=http://www.ctscorp.com/components/Datasheets/008-0309-0.pdf, Crystal Cut=AT-Cut, DatasheetVersion="Rev. K", Drive Level (Type)="100 uW", ESR Maximum="40 Ohms", Mounting Technology="Surface Mount", Oscillation Mode="Fundamental or 3rd Overtone", PackageDescription="2-Pin SMD, Body 11.1 x 4.83 mm, Pitch 8.5 mm", PackageReference=ATS-SM-XTAL-2, Packing="Tape and Reel", PartNumber=ATS16ASM-1, RoHS=TRUE
X1: ComponentLink1Description=Datasheet, ComponentLink1URL=http://cfd.citizen.co.jp/english/prod-tech/product/pdf/datasheet_AT/HCM49_E.pdf

## Free pads (board coordinates)
  round 315 hole 165 unplated: NC(201.85,245) NC(201.85,2213.5) NC(2239.25,245) NC(2239.25,2213.5) NC(5319.96,245) NC(5319.96,2213.5)

## Via types
v1: diameter 27.56, hole 15.75, Top Layer to Bottom Layer, 84 vias

## Nets (pads, with @x,y where several pads share a name; then routed paths per layer and width w, separated by ;. In a path a pad name is that pad's centre, name@x,y a point inside that pad or via, vN(x,y) a via of type N, cw(c..) or ccw(c..) an arc to the next point about the centre after c; other vN are vias at no path point)
+5: C1.2 C2.2 C6.2 C14.2 J3.4 L2.2 P2.2 R4.2 R5.2 R13.2 R26.2 U1.14 U2.3 U3.5 U3.17 U3.38 U4.5 U5.8 U8.2 U8.4 U9.3 | length 10023.9
  Top Layer w20: J3.4 626.93,1955 1506.85,1955 1536.85,1925 ; U3.38 1285.35,1481.5 v1(1291.85,1487.99) ; v1(1281.85,518.19) 1348.35,584.69 R13.2 1348.35,917.99 1395.35,965 U3.5 1395.35,1289.45 1391.85,1292.95 v1(1391.85,1290) ; v1(1466.85,1290) 1466.85,1405 1511.85,1450 U3.17 1731.85,1450 1731.85,1730 1536.85,1925 ; L2.2 1521.57,1802.87 1536.85,1818.15 1536.85,1925 ; U9.3 1950.35,1845 1975.35,1870 C2.2 ; R26.2@1927.91,1385.12 1924.13,1381.34 1871.85,1381.34 1871.85,1241.87 2563.72,550 U5.8 ; U8.4 2306.02,1490 v1(2691.85,1490) ; v1(2856.85,1530) 2907.44,1479.41 U4.5 ; v1(3301.85,1481.5) 3396.34,1387.01 3741.85,1387.01 3886.85,1532.01 ; U1.14 3886.97,1693.11 3888.78,1691.3 3888.78,1671.57 C6.2@3935.67,1624.69 ; C6.2 3937.68,1607.33 3937.68,1582.84 3886.85,1532.01 ; v1(4161.85,1783.5) C1.2 4300.94,1783.5 4310.55,1793.11 U2.3 ; R4.2 4567.48,1965 4542.48,1940 4491.85,1940 4456.85,1905 4456.85,1730 4491.85,1695 4546.85,1695 4566.85,1675 4566.85,1600 4551.85,1585 4250.24,1585 4200.24,1635 v1(4161.85,1635) 4121.85,1635 4018.86,1532.01 3886.85,1532.01
  Top Layer w40: 1731.85,1450 1796.73,1385.12 1927.91,1385.12 R26.2 1986.26,1439.53 2035.2,1439.53 C14.2 2218.46,1441.18 2241.89,1464.61 2241.89,1481.93 2269.13,1509.17 2286.85,1491.46 U8.2
  Bottom Layer w20: P2.2 920.04,518.19 v1(1281.85,518.19) ; v1(1291.85,1487.99) 1291.85,1345 1346.85,1290 v1(1391.85,1290) v1(1466.85,1290) ; v1(2691.85,1490) 2731.85,1530 v1(2856.85,1530) ; v1(3006.85,1485) 3010.35,1481.5 v1(3301.85,1481.5) ; v1(4161.85,1635) v1(4161.85,1783.5)
+5_ISO: R20.1 R23.2 U5.1 U6.8 | length 1036.2
  Top Layer w20: U5.1 v1(3026.85,550) ; v1(3346.85,431.16) 3456.63,431.16 R23.2 3456.85,470 3476.85,490 3691.85,490 3704.13,502.28 U6.8
  Top Layer w40: R20.1 R23.2
  Bottom Layer w20: v1(3026.85,550) 3228.01,550 v1(3346.85,431.16)
+12: C13.2 J1.2 J5.12 Q1.3 Q3.3 Q5.3 R6.2 R7.2 R17.2 R22.2 U7.1 U8.3 | length 9565.4
  Top Layer w20: J1.2 370.31,768.46 v1(426.85,825) 428.31,826.46 626.82,826.46 R6.2 ; 2326.85,1145 2326.85,1092.05 2331.85,1087.05 v1(2331.85,1085) ; v1(2456.85,1275) 2549.41,1275 2819.41,1545 R7.2 2819.41,1862.44 Q1.3 2824.11,1892.74 2824.11,1927.26 2851.85,1955 2951.85,1955 2981.85,1925 2981.85,1885 2991.61,1875.24 Q5.3 ; R22.2 3119.41,1862.44 Q5.3 ; R17.2 3419.41,1862.44 Q3.3 3296.61,1875.24 3272.59,1899.26 3272.59,1939.26 3256.85,1955 3151.85,1955 3124.11,1927.26 3124.11,1892.74 Q5.3
  Top Layer w40: C13.2 2326.85,1145 2377.4,1195.55 ; v1(2456.85,1080) 2377.4,1159.45 2377.4,1195.55 ; v1(2456.85,1275) 2383.23,1275 U8.3 2377.4,1195.55 ; v1(5285.73,1275) 5835.73,725 6039.35,725 J5.12
  Bottom Layer w20: v1(426.85,825) 428.3,826.45 433.64,826.45 688.32,826.46 946.85,1085 v1(2331.85,1085)
  Bottom Layer w40: v1(2456.85,1080) 2456.85,435 U7.1 ; v1(2456.85,1275) v1(5285.73,1275)
+12_ISO: R20.2 R21.2 U7.5 | length 738.4
  Top Layer w40: U7.5 2946.85,281.89 2986.85,241.89 R20.2 3457.48,241.26 R21.2
CAN_CS: U1.13 U3.43 | length 3199.2
  Top Layer w20: v1(1131.85,1325) 1132.83,1324.02 U3.43 ; v1(3481.85,1450) 3731.85,1450 3799.53,1517.68 3799.53,1715 3826.56,1742.03 3868.18,1742.03 U1.13
  Bottom Layer w20: v1(1131.85,1325) 1131.85,1405 1246.85,1520 1331.85,1520 1402.13,1449.72 1836.85,1449.72 3476.57,1449.72 v1@3476.85,1450
CAN_INT: U1.4 U3.40 | length 4620
  Top Layer w20: v1(1141.85,1015) 1191.85,1065 1191.85,1195 1091.85,1295 1091.85,1355 1155.35,1418.5 U3.40 ; v1(2331.85,880) 2386.85,880 v1(2586.85,1080) ; v1(2716.85,1080) 2974.02,1337.17 3969.02,1337.17 v1(4181.85,1550) ; U1.4 4160.63,1843.11 v1(4161.85,1841.89)
  Bottom Layer w20: v1(1141.85,1015) 1056.85,1015 1016.85,975 1016.85,925 1061.85,880 v1(2331.85,880) ; v1(2586.85,1080) v1(2716.85,1080) ; v1(4161.85,1841.89) 4106.85,1786.89 4106.85,1625 v1(4181.85,1550)
CAN_N: J5.2 R3.2 U2.6 | length 1714.1
  Top Layer w20: U2.6 4671.69,1793.11 4683.65,1781.15 4711.1,1781.15 4719.8,1772.45 R3.2
  Top Layer w40: R3.2 4719.8,1707.05 4791.85,1635 5201.85,1635 5854.35,982.5 J5.2
CAN_P: J5.11 R2.2 U2.7 | length 2128.6
  Top Layer w20: U2.7 4677.91,1843.11 4683.65,1848.85 4711.1,1848.85 4719.8,1857.55 R2.2
  Top Layer w40: R2.2 4719.8,1920.12 4791.85,1992.17 4979.68,1992.17 5744.29,1227.56 5924.29,1227.56 6122.28,1029.57 6122.28,992.07 J5.11
CAN_RX: LED2.2 U1.2 U2.4 | length 340.8
  Top Layer w20: U1.2 U2.4 4329.92,1742.44 LED2.2
CAN_RX_LED: LED2.1 R5.1 | length 118.3
  Top Layer w20: LED2.1 4508.58,1650 4512.36,1646.22 R5.1
CAN_SPLIT: C7.2 R1.2 R2.1 R3.1 | length 411.8
  Top Layer w20: R3.1 R2.1@4830.04,1857.55 ; R1.2 4903.33,1848.09 4866.95,1848.09 4866.19,1848.85 4838.74,1848.85 R2.1@4830.04,1857.55 ; C7.2 4930.35,1905 4838.74,1905 4830.04,1896.3 R2.1 R2.1@4830.04,1857.55
CAN_SPLIT_R: R1.1 U2.5 | length 405.1
  Top Layer w20: U2.5 4614.96,1743.11 v1(4616.85,1745) ; R1.1 4906.85,1781.57 v1(4906.85,1745)
  Bottom Layer w20: v1(4616.85,1745) v1(4906.85,1745)
CAN_TX: LED1.2 U1.1 U2.1 | length 600.5
  Top Layer w20: U1.1 4253.74,1693.11 v1(4256.85,1690) ; v1(4256.85,1920) 4297.02,1920 4308.74,1908.28 4308.74,1894.92 4310.55,1893.11 U2.1 4329.25,1992.8 LED1.2
  Bottom Layer w20: v1(4256.85,1690) v1(4256.85,1920)
CAN_TX_LED: LED1.1 R4.1 | length 114
  Top Layer w20: LED1.1 R4.1
CAN_X1_20MHz: C8.2 U1.6 X1.1 | length 482.7
  Top Layer w20: U1.6 4080.78,1944.19 4039.16,1944.19 4008.35,1975 4008.35,2055 4063.64,2110.3 4063.64,2138.58 4083.17,2158.11 X1.1 4148.35,2172.28 C8.2
CAN_X2_20MHz: C9.1 U1.5 X1.2 | length 583.1
  Top Layer w20: C9.1 3790.35,2167.28 X1.2 3878.27,2158.11 3897.8,2138.58 3897.8,2124.06 3966.85,2055 3966.85,1963.35 4037.09,1893.11 U1.5
GND: C1.1 C2.1 C6.1 C7.1 C8.1 C9.2 C10.1 C11.1 C12.1 C13.1 C14.1 DS1.2 J1.1 J1.3 J3.3 J5.1 LED3.2 LED4.2 P2.6 Q2.2 Q4.2 Q6.2 R8.1 R9.1 R10.1 R12.1 R15.1 R19.1 R25.1 R27.2 SW1.1 U1.7 U2.2 U2.8 U3.6 U3.18 U3.28 U3.39 U4.3 U5.5 U7.2 U8.1 U9.4 U9.5 U9.8 U9.9 U9.10 U9.11 U9.12 | length 20990.2
  Top Layer w10: U4.3 3129.25,1540
  Top Layer w20: J1.3 355.37,875.09 326.94,875.09 301.85,850 301.85,685 325.02,661.83 355.37,661.83 J1.1 433.7,583.5 R9.1 ; v1(475.6,1210) 541.85,1210 631.85,1120 R8.1 ; R10.1 479.29,1427.56 v1(476.85,1430) 476.85,1432.05 485.04,1440.23 J3.3 501.28,1695 516.28,1710 v1(696.85,1710) R15.1 ; v1(696.85,1390) R12.1 ; v1(1021.85,1385) 1071.85,1385 1136.85,1450 U3.39 1204.69,1449.72 1327.68,1449.72 1327.96,1450 1426.85,1450 ; v1(1316.85,1885) C10.1 1391.42,1778.54 1426.85,1743.11 U3.28 1426.85,1479.41 ; U3.18 1428.94,1481.5 1426.85,1479.41 ; v1(1661.85,1210) 1661.85,981.53 LED3.2 LED4.2 ; v1(1696.85,1840) 1745.63,1791.22 1754.13,1791.22 R27.2 ; C12.1 v1(1591.85,250) C11.1 1386.85,210 1361.85,185 1301.85,185 1269.37,217.48 1269.37,445 1408.78,584.41 SW1.1 1408.78,777.72 1414.53,783.46 1415.13,783.46 1426.85,795.18 U3.6 1426.85,1450 ; U9.4 U9.5 U9.10 ; v1(2006.85,1795) U9.11 ; C2.1 2038.35,1867.87 2059.72,1846.5 2090.2,1846.5 2090.87,1845.83 2111.02,1845.83 U9.12 U9.11 ; U9.8 U9.9 U9.10 ; 2521.85,1150 2521.85,1180 v1(2831.85,1490) ; v1(2581.85,700) U5.5 ; Q2.2 2709.6,1640.63 v1(2780.23,1570) ; Q6.2 2990.14,1590.73 2977.13,1577.72 2973.19,1577.72 2969.41,1573.94 R25.1 v1(3011.85,1570) 3129.25,1570 ; 3129.25,1540 3129.25,1570 ; v1(3166.85,1570) 3129.25,1570 ; Q4.2 3290.14,1590.73 3277.13,1577.72 3273.19,1577.72 3273.19,1570 v1(3331.85,1570) ; C9.2 C8.1 4090.07,2287.83 4090.07,2318.22 4106.85,2335 4221.85,2335 4296.85,2260 4296.85,2130 v1(4146.85,1980) ; C6.1 v1(4008.35,1845) ; U1.7 4082.79,1992.17 4124.68,1992.17 4176.85,1940 4176.85,1899.57 4220.24,1856.18 4220.24,1854.21 4227.95,1846.5 C1.1 4233.31,1843.11 U2.2 ; U2.8 4589.72,1893.11 v1(4626.61,1930) v1@4626.85,1930.24 ; 1426.85,1450 1426.85,1479.41 ; U9.10 U9.11
  Top Layer w40: J1.3 291.85,961.57 291.85,1085 416.85,1210 v1(475.6,1210) ; C14.1 2059.72,1338.82 2061.38,1337.17 DS1.2 2141.85,1200 ; v1(2131.85,1210) 2141.85,1200 ; C13.1 2195.35,1200 ; U8.1 2195.98,1280.51 2195.98,1241.87 2195.35,1241.24 2195.35,1200 ; v1(2461.85,1210) 2521.85,1150 v1(2521.85,1080) ; C7.1 v1(5061.85,1779.57) ; v1(5136.85,1565) v1(5491.85,1210) 5881.85,820 J5.1 ; 2141.85,1200 2195.35,1200
  Bottom Layer w20: v1(475.6,1210) 476.85,1211.25 v1(476.85,1430) ; v1(696.85,1710) v1(696.85,1390) 701.85,1385 v1(1021.85,1385) ; P2.6 1151.85,250 v1(1591.85,250) ; v1(1316.85,1885) 1651.85,1885 ; v1(1696.85,1840) 1651.85,1885 ; v1(2006.85,1795) 1916.85,1885 1651.85,1885 ; 2521.85,705 2526.85,700 v1(2581.85,700) ; v1(2780.23,1570) 2861.85,1570 ; v1(2831.85,1490) 2871.85,1490 2891.85,1510 2891.85,1550 2871.85,1570 2861.85,1570 ; v1(3011.85,1570) 2861.85,1570 ; v1(3166.85,1570) v1(3331.85,1570) ; v1(4008.35,1845) 4143.35,1980 v1(4146.85,1980) 4576.61,1980 v1(4626.61,1930) 4777.05,1779.57 v1(5061.85,1779.57)
  Bottom Layer w40: v1(475.6,1210) v1(1661.85,1210) v1(2131.85,1210) v1(2461.85,1210) v1(5491.85,1210) ; v1(2521.85,1080) 2521.85,705 2521.85,470 U7.2 ; v1(5061.85,1779.57) 5061.85,1640 v1(5136.85,1565)
GND_ALT: J1.4 J5.3 | length 5600.7
  Top Layer w40: J1.4 374.5,1012.34 374.5,1057.65 461.85,1145 v1(473.1,1145)
  Bottom Layer w40: v1(473.1,1145) 5879.35,1145 J5.3
GND_ISO: R23.1 R24.1 U5.4 U6.4 U7.7 | length 1908.8
  Top Layer w20: U5.4 v1(3026.85,700) ; v1(3906.85,185) U6.4
  Top Layer w40: U7.7 3146.85,405 3290.91,549.06 v1@3346.85,549.06 ; v1(3346.85,550) v1@3346.85,549.06 ; R24.1 3457.17,549.37 R23.1 v1@3346.85,549.06
  Bottom Layer w40: v1(3026.85,700) 3196.85,700 v1(3346.85,550) 3711.85,185 v1(3906.85,185)
HV: J2.1 J2.3 J4.1 J4.3 R16.2 | length 1879.1
  Top Layer w40: R16.2 4195.16,240.94 4316.11,120 4571.85,120 ; J4.3 J4.1 4571.85,304.06 4571.85,120 ; J2.3 J2.1 5056.85,309.06 5056.85,205 4971.85,120 4571.85,120
HV_GND: J2.2 J2.4 J4.2 J4.4 R18.1 | length 1129.1
  Top Layer w40: R18.1 4316.11,549.06 4346.97,518.19 J4.4 ; J4.2 J4.4 ; J2.2 J2.4 4765.98,600 4411.85,600 4365.45,553.6 4365.45,525.84 J4.4
HV_SENSE_OFF_MOSFET: Q5.1 Q6.3 R22.1 | length 296.7
  Top Layer w20: Q5.1 2927.09,1857.74 2952.74,1832.09 Q6.3 3024.92,1719.37 3056.57,1687.72 3060.51,1687.72 3064.29,1683.94 R22.1
HV_SENSE_ON: Q4.1 R19.2 U3.37 U4.2 U5.7 | length 3965.3
  Top Layer w10: U4.2 3146.85,1505
  Top Layer w20: v1(1096.85,955) 1096.85,1220.47 966.85,1350.47 966.85,1410 996.38,1439.53 1066.85,1439.53 1140.32,1512.99 U3.37 ; U5.7 2561.85,600 2406.85,755 v1(2406.85,775) 2406.85,843.52 2943.33,1380 3125.67,1380 3183.98,1438.31 3183.98,1505 ; 3146.85,1505 3183.98,1505 ; Q4.1 3215.33,1571.04 R19.2 3214.29,1535.31 3183.98,1505
  Bottom Layer w20: v1(1096.85,955) 2315.4,955 2406.85,863.55 v1(2406.85,775)
HV_SENSE_ON_MOSFET: Q3.1 Q4.3 R17.1 | length 296.7
  Top Layer w20: Q3.1 3227.09,1857.74 3252.74,1832.09 Q4.3 3324.92,1719.37 3356.57,1687.72 3360.51,1687.72 3364.29,1683.94 R17.1
HV_SPLIT: R16.1 R18.2 U6.6 | length 417.4
  Top Layer w20: U6.6 3856.85,545 3876.85,565 3936.85,565 3961.85,540 3961.85,465 3984.77,442.08 4040.72,442.08 R18.2
  Top Layer w40: R16.1 R18.2
IMD_MEASUREMENT: J1.5 J5.6 R9.2 R14.2 | length 7271.8
  Top Layer w20: J1.5 488.9,646.5 R9.2 751.85,766.5 v1(751.85,1260) ; v1(651.85,1795) R14.2 ; v1(5391.85,1841.89) 5591.24,1642.5 J5.6
  Bottom Layer w20: v1(751.85,1260) 576.85,1260 536.85,1300 536.85,1510 651.85,1625 v1(651.85,1795) 791.85,1935 2401.85,1935 2621.85,2155 5078.74,2155 v1(5391.85,1841.89)
IMD_MEASUREMENT_LOW: J1.6 R6.1 | length 146.8
  Top Layer w20: J1.6 631.81,768.46 R6.1
IMD_STATUS: J1.8 J5.5 Q2.1 R8.2 R11.2 | length 6810.8
  Top Layer w20: J1.8 630.67,1004.69 R8.2 675.35,1003.5 701.85,1030 701.85,1295 651.85,1345 651.85,1430 696.85,1475 R11.2 746.42,1494.57 v1(816.85,1565) ; v1(2541.85,1645) 2543.9,1645 2548.27,1640.63 Q2.1 ; v1(5305.73,1840) 5305.73,1836.12 5664.35,1477.5 J5.5
  Bottom Layer w20: v1(816.85,1565) 994.96,1743.11 2287.7,1743.11 ; v1(2541.85,1645) 2443.74,1743.11 2287.7,1743.11 ; v1(5305.73,1840) 5301.85,1840 5031.55,2110.3 2654.89,2110.3 2287.7,1743.11
INT1: U1.9
INT2: U1.8
LEM_MEASUREMENT: J3.2 J5.8 R10.2 U3.36 U9.6 | length 7267.2
  Top Layer w20: J3.2 291.85,1738.11 291.85,1445 364.41,1372.44 R10.2 v1(601.85,1305) ; v1(1061.85,1487.99) 1118.35,1544.49 U3.36 1376.34,1544.49 v1(1376.85,1545) ; v1(1836.85,1695) U9.6 1950.83,1695 2038.35,1607.48 2324.33,1607.48 v1(2491.85,1775)
  Bottom Layer w20: v1(601.85,1305) 991.85,1305 1061.85,1375 v1(1061.85,1487.99) ; v1(1376.85,1545) 1686.85,1545 v1(1836.85,1695) ; v1(2491.85,1775) 2737.34,2020.49 4956.36,2020.49 5181.85,1795 6141.85,1795 6226.85,1710 6226.85,1572.5 J5.8
LEM_VREF: J3.1
LV_SPLIT: R21.1 R24.2 U6.5 | length 422.6
  Top Layer w20: R24.2 3869.57,431.26 3905.04,466.73 3905.04,500.47 U6.5
  Top Layer w40: R21.1 R24.2
MCU_AVCC: C10.2 L2.1 U3.27 | length 214.2
  Top Layer w20: U3.27 1458.35,1791.22 L2.1 1462.28,1795.16 C10.2
MCU_CLK: P2.3 U1.10 U3.3 | length 4270.6
  Top Layer w20: P2.3 951.85,350 951.85,630 1332.36,1010.51 U3.3 1332.36,1295.51 v1(1366.85,1330) ; v1(3696.85,1501.14) 3655.71,1501.14 3601.85,1555 3601.85,1760 3734.96,1893.11 U1.10
  Bottom Layer w20: v1(1366.85,1330) 3526.85,1330 3697.99,1501.14 v1(3696.85,1501.14)
MCU_LED_A: R29.1 U3.15 | length 340.1
  Top Layer w20: U3.15 1692.36,1387.01 1746.85,1332.52 R29.1
MCU_LED_B: R30.1 U3.16 | length 411.2
  Top Layer w20: U3.16 1703.35,1418.5 1826.85,1295 R30.1
MCU_MISO: P2.1 U1.12 U3.2 | length 4110.8
  Top Layer w20: P2.1 851.85,350 851.85,640 v1(1211.85,1000) ; v1(1286.85,1030) 1300.87,1044.02 U3.2 1300.87,1329.02 1341.85,1370 v1(1366.85,1370) ; v1(3711.85,1570) 3711.85,1720.47 3784.49,1793.11 U1.12
  Bottom Layer w20: v1(1211.85,1000) 1256.85,1000 v1(1286.85,1030) ; v1(1366.85,1370) 3511.85,1370 v1(3711.85,1570)
MCU_MOSI: P2.4 U1.11 U3.1 | length 4007.4
  Top Layer w20: P2.4 901.85,637.17 1253.07,988.39 1253.07,1087.79 1269.37,1104.09 U3.1 1269.37,1357.52 1321.85,1410 v1(1366.85,1410) ; v1(3661.85,1575) 3661.85,1740 3764.96,1843.11 U1.11
  Bottom Layer w20: v1(1366.85,1410) 3496.85,1410 v1(3661.85,1575)
MCU_RESET: P2.5 R13.1 SW1.2 U3.4 | length 1086.2
  Top Layer w20: P2.5 1285.35,583.5 R13.1 1285.35,731.85 1274.92,742.28 SW1.2 1274.92,891.06 1363.86,980 U3.4
MCU_XTAL_1: C12.2 U3.8 X2.2 | length 1160.6
  Top Layer w20: U3.8 1489.84,674.33 1711.36,452.81 1711.36,424.53 1730.89,405 X2.2 1787.46,405 1806.98,385.47 1806.98,357.19 1851.85,312.32 C12.2
MCU_XTAL_2: C11.2 U3.7 X2.1 | length 1054.9
  Top Layer w20: C11.2 1331.73,312.2 1376.72,357.19 1376.72,385.47 1396.24,405 X2.1 1438.82,405 1458.35,424.53 U3.7
NetJ5_4: J5.4 Q5.2 | length 3310.6
  Top Layer w40: Q5.2 3016.85,1945 v1(3036.85,1925)
  Bottom Layer w40: v1(3036.85,1925) 3251.85,1710 3844.35,1710 4154.35,1400 5541.85,1400 5629.35,1312.5 J5.4
NetJ5_7: J5.7 R28.2 U9.1 | length 4890.3
  Top Layer w20: R28.2 1826.85,1972.56 1854.41,1945 U9.1 1905.16,2048.31 1931.85,2075 2076.85,2075 2341.85,1810 v1(2443.74,1810) ; v1(5171.85,1890) 5884.35,1890 J5.7
  Bottom Layer w20: v1(2443.74,1810) 2703.74,2070 4986.85,2070 5166.85,1890 v1(5171.85,1890)
NetJ5_9: J5.9 Q3.2 | length 3267.6
  Top Layer w40: Q3.2@3311.85,2133.58 Q3.2 3316.85,1945 v1(3341.85,1920)
  Bottom Layer w40: v1(3341.85,1920) 3486.85,1775 3876.85,1775 4181.85,1470 5566.85,1470 5641.85,1395 6049.35,1395 J5.9
NetJ5_10: J5.10 Q1.2 | length 3969.9
  Top Layer w40: v1(2716.85,1875) Q1.2
  Bottom Layer w40: v1(2716.85,1875) 2951.22,1640.63 3820.46,1640.63 4122.27,1338.82 5503.03,1338.82 5611.85,1230 6049.35,1230 J5.10
NetLED3_1: LED3.1 R29.2 | length 94
  Top Layer w20: LED3.1 R29.2
NetLED4_1: LED4.1 R30.2 | length 94
  Top Layer w20: LED4.1 R30.2
NetP1_1: P1.1 U3.10 | length 691.1
  Top Layer w20: U3.10 1552.83,924.02 P1.1
NetP1_2: P1.2 U3.9 | length 662.7
  Top Layer w20: U3.9 1521.34,855.51 P1.2
NetQ1_1: Q1.1 Q2.3 R7.1 | length 296.6
  Top Layer w20: Q1.1 2627.09,1857.74 2644.59,1840.24 2645.13,1840.24 2656.85,1828.52 Q2.3 2719.92,1719.37 2756.57,1682.72 2760.51,1682.72 2764.29,1678.94 R7.1
NetQ6_1: Q6.1 R25.2 U4.4 | length 249.5
  Top Layer w20: Q6.1 2915.33,1571.04 R25.2 2918.07,1566.22 2918.07,1543.78 2941.85,1520 3043.86,1520 U4.4
NetR11_1: R11.1 R12.2 U3.35 | length 514
  Top Layer w20: R12.2 R11.1 918.27,1575.98 U3.35
NetR14_1: R14.1 R15.2 U3.34 | length 514.6
  Top Layer w20: R14.1 R15.2 919.8,1607.48 U3.34
NetR27_1: R27.1 R28.1 U9.7 | length 430.7